# Altium PCB PCB.PcbDoc
Units mm, origin at the board's own origin, x right, y up, seen from the top; angles counter-clockwise.
Board outline 59.59 x 58.75 mm, 2 copper layers (Top Layer, Bottom Layer), stack 1 mm thick; 29 components, 23 nets, 150 pads, 124 vias.
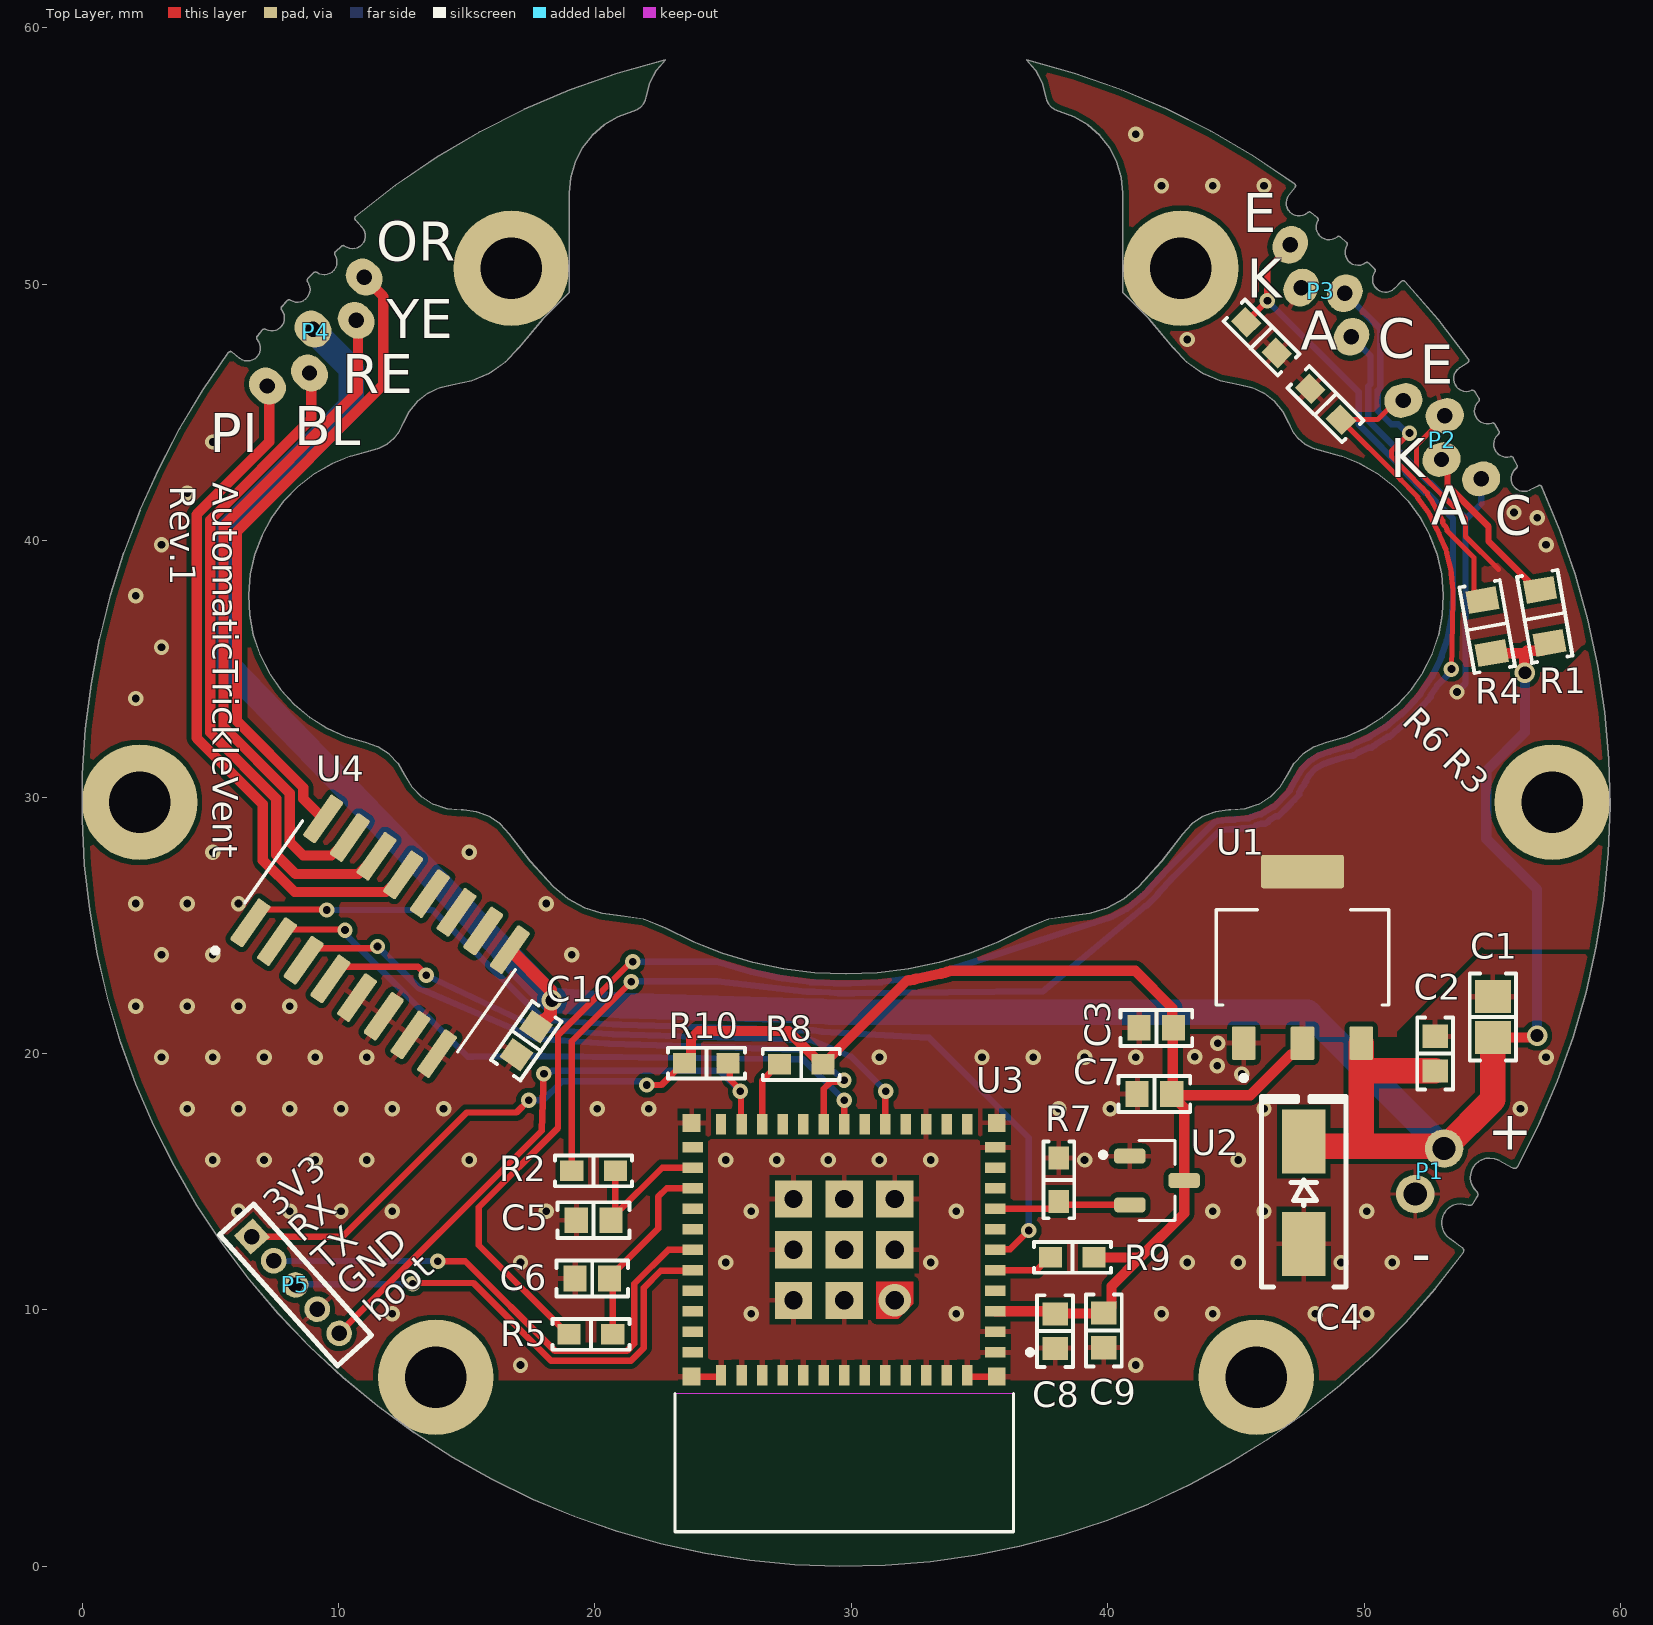
[diagram p0: Top Layer view]
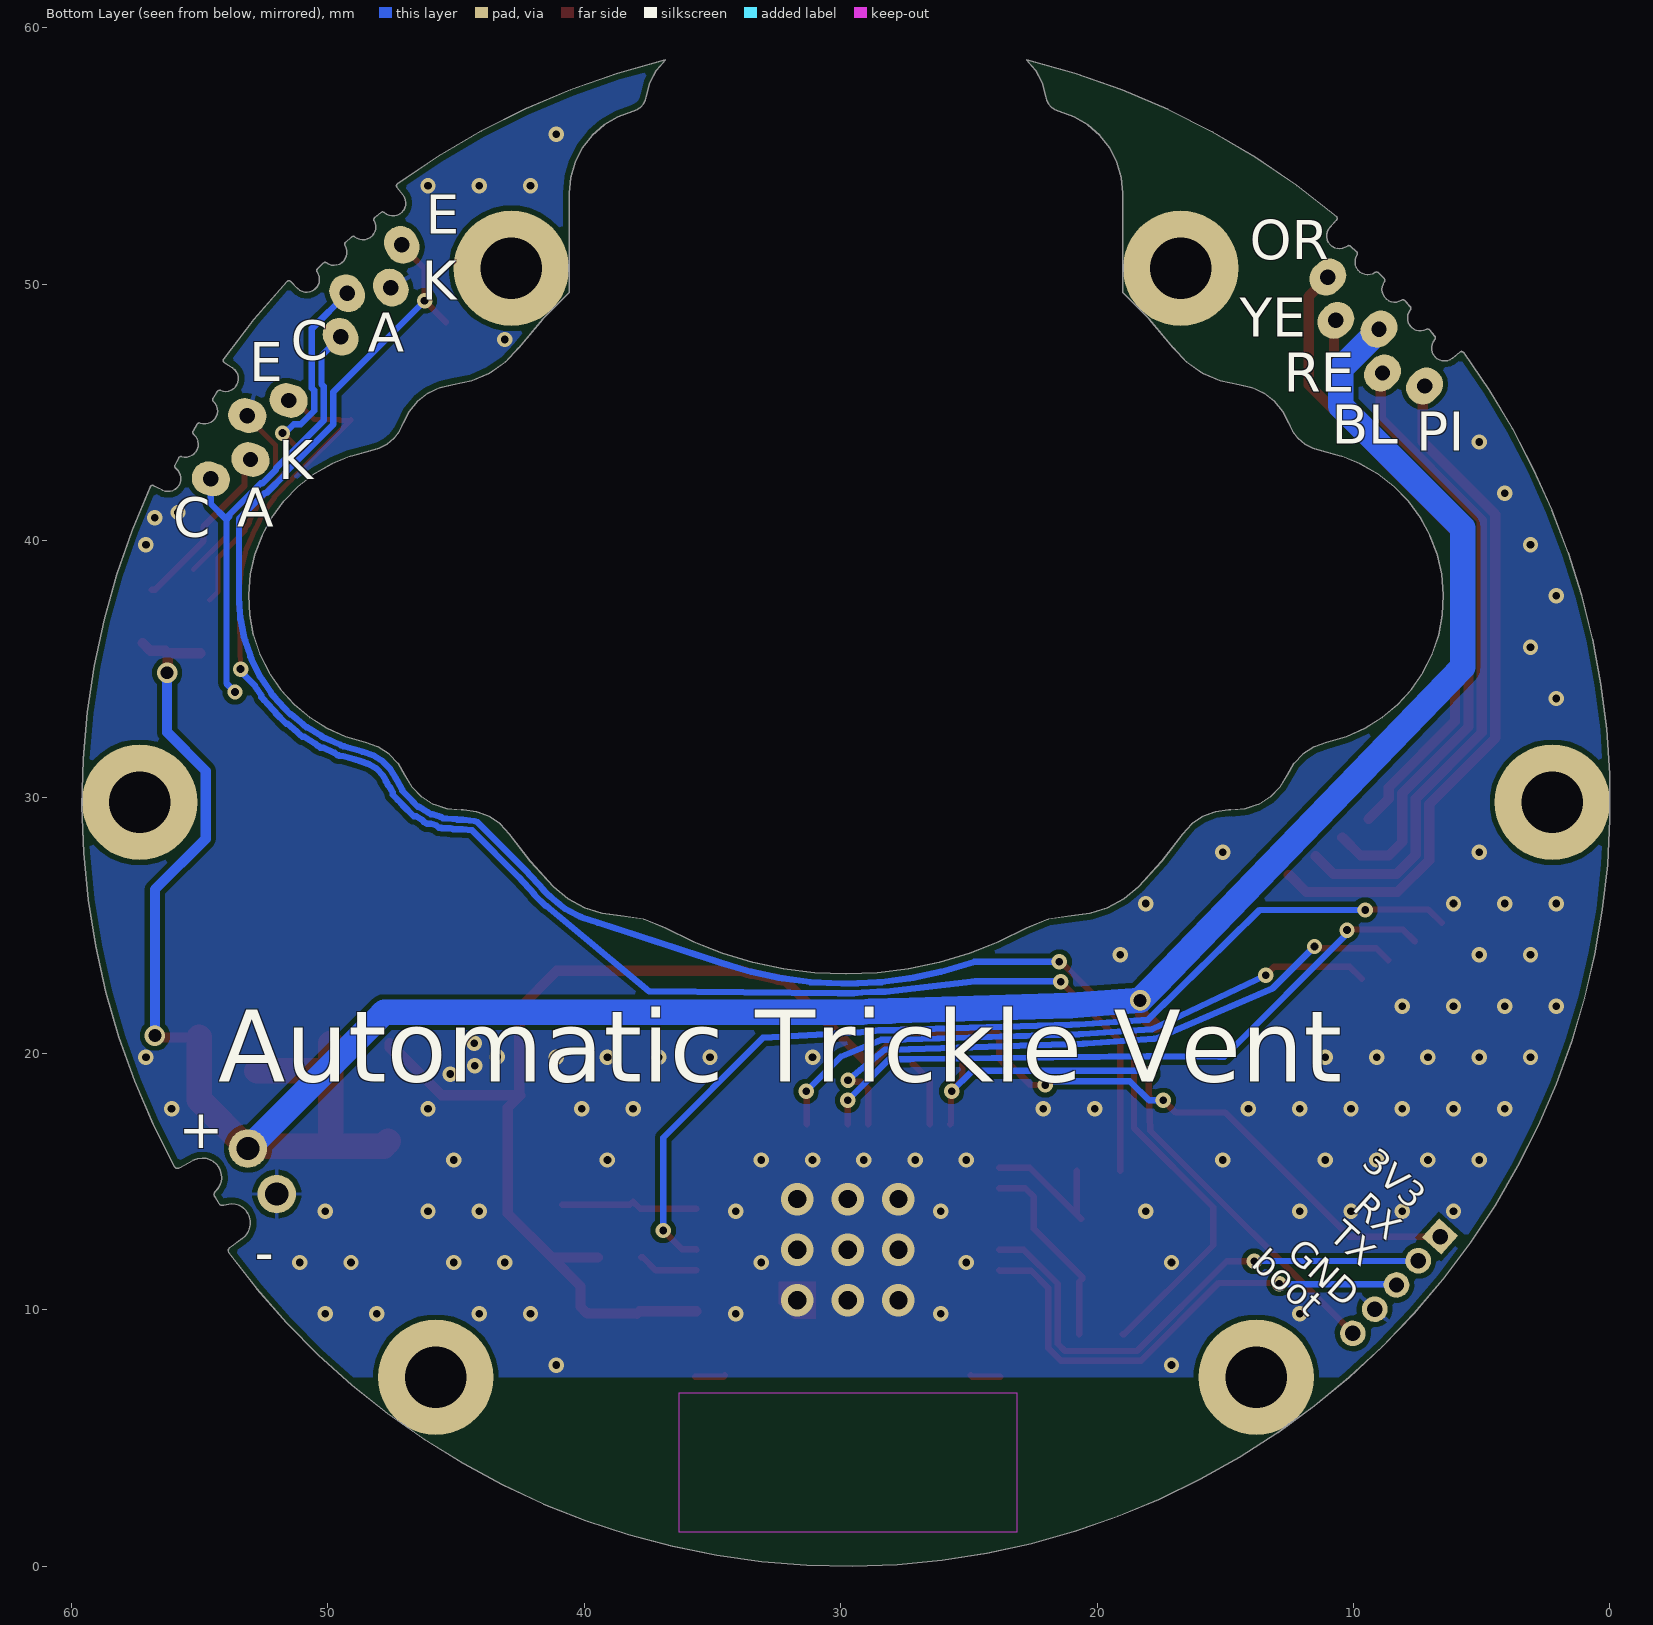
[diagram p1: Bottom Layer view, seen from below]
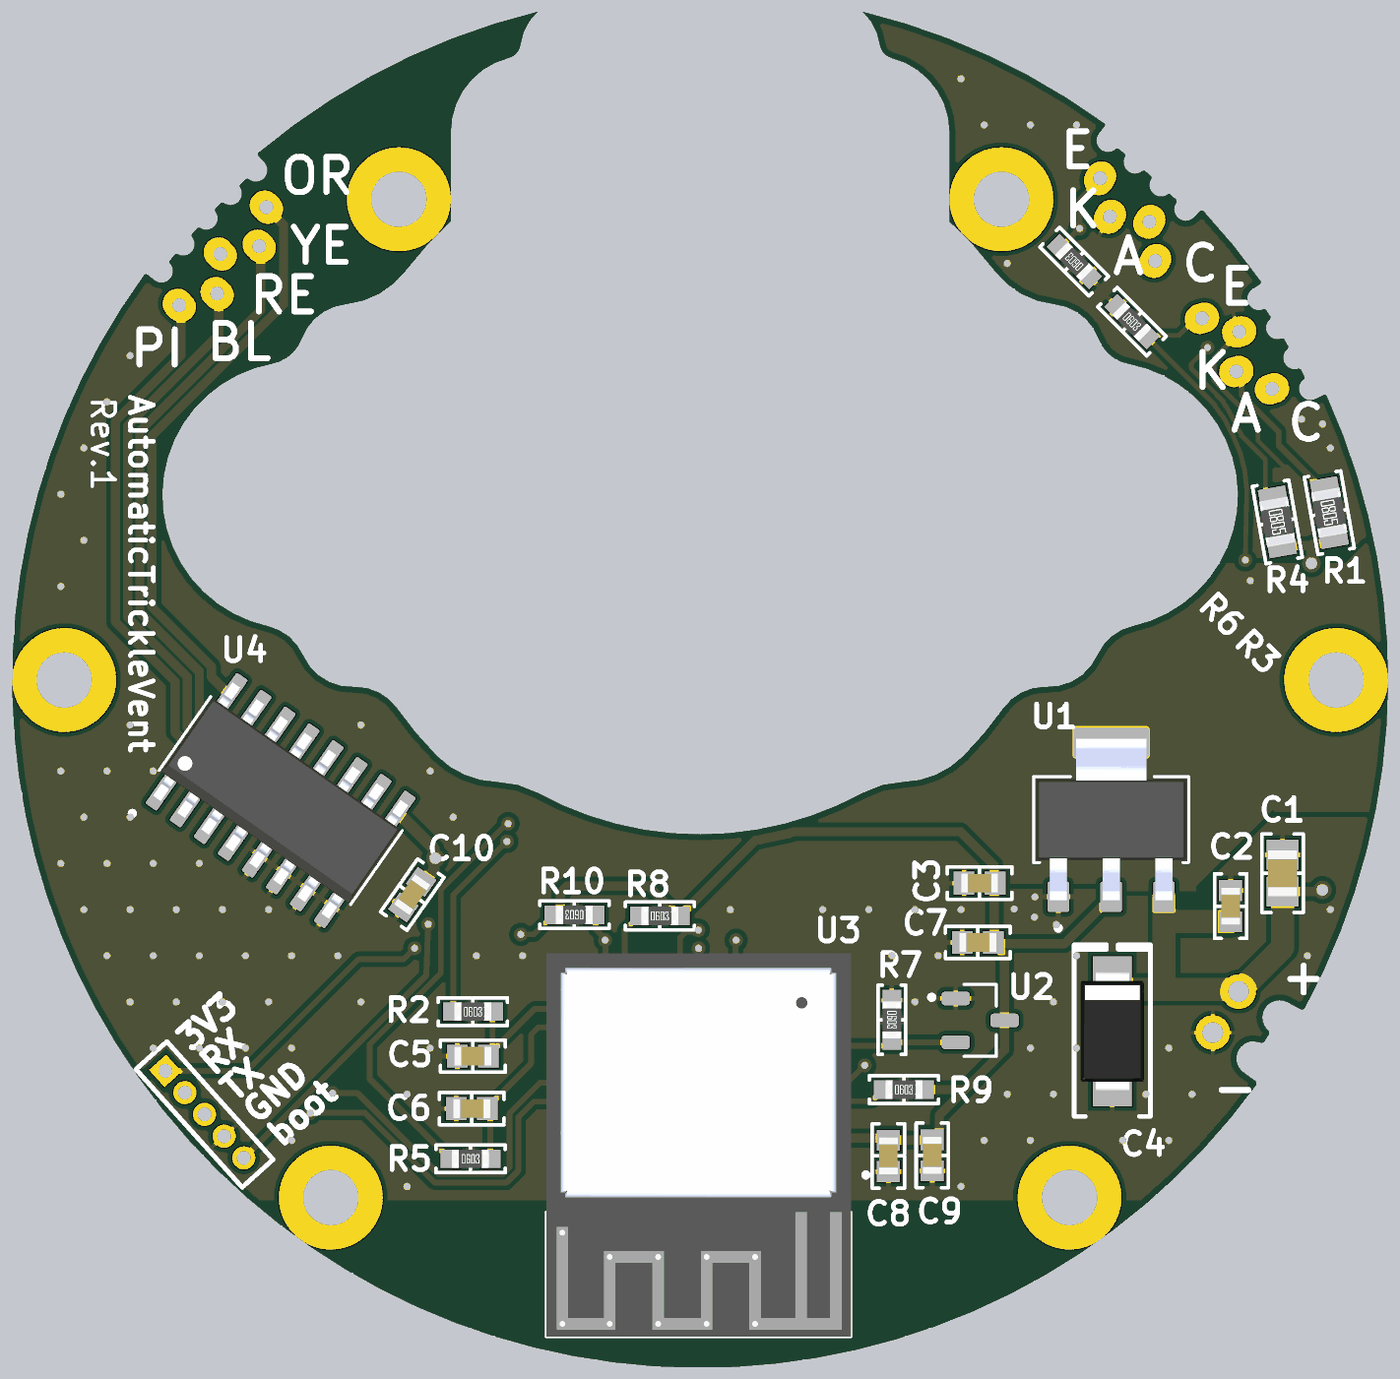
[diagram p2: 3D render of the assembled board from above, using the file's embedded part models]

## Layer stack, top to bottom
Top Solder: solder mask 0.0102, Solder Resist, Dk 3.5
Top Layer: signal copper 0.018
Dielectric 1: dielectric 0.964, FR-4, Dk 4.8
Bottom Layer: signal copper 0.018
Bottom Solder: solder mask 0.0102, Solder Resist, Dk 3.5

## Board outline
668 vertices, not listed, extent 0.004,-0.001 59.595,58.753

## Design rules (kind name [scope] priority, off if disabled: settings)
AcuteAngle [All] p1: minimum=3.50000000000000E+0001 checktracksonly=FALSE
BoardOutlineClearance "BoardOutlineClearance 1" [All] p1: gap=0.25 ignorepadtopadclearanceinfootprint=FALSE except(0: Arc-SplitContinuation Track-SplitContinuation SMDPad-SplitContinuation THPad-SplitContinuation Via-SplitContinuation Fill-SplitContinuation Poly-SplitContinuation Region-SplitContinuation Text-SplitContinuation) // Milling
BoardOutlineClearance "BoardOutlineClearance 2" [All] p2: gap=0.4 ignorepadtopadclearanceinfootprint=FALSE except(0: Arc-SplitContinuation Track-SplitContinuation SMDPad-SplitContinuation THPad-SplitContinuation Via-SplitContinuation Fill-SplitContinuation Poly-SplitContinuation Region-SplitContinuation Text-SplitContinuation) // V-Cut
Clearance "Clearance 3 Oz" [All] p1 off: gap=0.35 ignorepadtopadclearanceinfootprint=FALSE except(0.25: Arc-Hole Track-Hole SMDPad-Hole THPad-Hole Via-Hole Fill-Hole Poly-Hole Region-Hole Text-Hole)
Clearance "Clearance 2 Oz" [All] p2 off: gap=0.3 ignorepadtopadclearanceinfootprint=FALSE except(0.25: Arc-Hole Track-Hole SMDPad-Hole THPad-Hole Via-Hole Fill-Hole Poly-Hole Region-Hole Text-Hole)
Clearance "Clearance-1 1 Oz" [All] p3 off: gap=0.2 ignorepadtopadclearanceinfootprint=FALSE except(0.25: Arc-Hole Track-Hole SMDPad-Hole THPad-Hole Via-Hole Fill-Hole Poly-Hole Region-Hole Text-Hole) // Standart
Clearance "Clearance-2 1 Oz" [All] p4 off: gap=0.15 ignorepadtopadclearanceinfootprint=FALSE except(0.2: Arc-Fill Arc-Poly Track-Fill Track-Poly SMDPad-Fill SMDPad-Poly THPad-Fill THPad-Poly Via-Fill Via-Poly Fill-Fill Fill-Poly Poly-Poly; 0.25: Arc-Hole Track-Hole SMDPad-Hole THPad-Hole Via-Hole Fill-Hole Poly-Hole Region-Hole Text-Hole) // Advance
Clearance "Clearance-1 1/2 Oz" [All] p5: gap=0.125 ignorepadtopadclearanceinfootprint=FALSE except(0.2: Arc-Fill Arc-Poly Track-Fill Track-Poly SMDPad-SMDPad SMDPad-Fill SMDPad-Poly THPad-Fill THPad-Poly Via-Fill Via-Poly Fill-Fill Fill-Poly Poly-Poly Poly-Region Poly-Text; 0.25: Arc-Hole Track-Hole SMDPad-Hole THPad-Hole Via-Hole Fill-Hole Poly-Hole Region-Hole Text-Hole) // Standart
Clearance "Clearance-2 1/2 Oz" [All] p6 off: gap=0.1 ignorepadtopadclearanceinfootprint=FALSE except(0.15: Arc-Fill Arc-Poly Track-Fill Track-Poly SMDPad-SMDPad SMDPad-Fill SMDPad-Poly THPad-Fill THPad-Poly Via-Fill Via-Poly Fill-Fill Fill-Poly Poly-Poly Poly-Region Poly-Text; 0.25: Arc-Hole Track-Hole SMDPad-Hole THPad-Hole Via-Hole Fill-Hole Poly-Hole Region-Hole Text-Hole) // Advance
DiffPairsRouting "DiffPairsRouting 1 Oz" [All] p1: maxlimit=0.254 minlimit=0.2 mostfreqgap=0.254 toplayer_minwidth=0.2 toplayer_maxwidth=0.381 toplayer_prefwidth=0.381 bottomlayer_minwidth=0.2 bottomlayer_maxwidth=0.381 bottomlayer_prefwidth=0.381 maxuncoupledlength=12.7
DiffPairsRouting "DiffPairsRouting 1/2 Oz" [All] p2: maxlimit=0.254 minlimit=0.1 mostfreqgap=0.254 toplayer_minwidth=0.1 toplayer_maxwidth=0.381 toplayer_prefwidth=0.381 bottomlayer_minwidth=0.1 bottomlayer_maxwidth=0.381 bottomlayer_prefwidth=0.381 maxuncoupledlength=12.7
HoleSize "Minimum HoleSize" [IsPad] p1: absolutevalues=TRUE maxlimit=5.9 minlimit=0.6 maxpercent=80.000 minpercent=20.000
HoleSize "Minimum HoleSize VIA 1" [IsVia] p2: absolutevalues=TRUE maxlimit=5.9 minlimit=0.3 maxpercent=80.000 minpercent=20.000 // Standart
HoleSize "Minimum HoleSize VIA 2" [IsVia] p3: absolutevalues=TRUE maxlimit=5.9 minlimit=0.2 maxpercent=80.000 minpercent=20.000 // Advance
HoleToHoleClearance Hole2HoleClearance [All] p1: gap=0.25 allowstackedmicrovias=FALSE
MinimumAnnularRing "Minimum AR VIA Standart" [IsVia] p1: minimumring=0.15
MinimumAnnularRing "Minimum AR PAD Standart" [IsPAD] p2: minimumring=0.2
MinimumAnnularRing "Minimum AR VIA Advance" [IsVia] p3: minimumring=0.1
MinimumAnnularRing "Minimum AR PAD Advance" [IsPAD] p4: minimumring=0.15
MinimumSolderMaskSliver "SolderMask Bridge Standart" [All] p1: minsoldermaskwidth=0.15 // All Masks
MinimumSolderMaskSliver "SolderMask Bridge Advance" [All] p2 off: minsoldermaskwidth=0.1 // Mask LDI
PlaneClearance "PlaneClearance 3 Oz" [All] p1 off: clearance=0.35
PlaneClearance "PlaneClearance 2 Oz" [All] p2 off: clearance=0.3
PlaneClearance "PlaneClearance 1 Oz" [All] p3 off: clearance=0.2
PlaneClearance "PlaneClearance-1 1/2 Oz" [All] p4: clearance=0.2 // Standart
PlaneClearance "PlaneClearance-2 1/2 Oz" [All] p5 off: clearance=0.15 // Advance
PlaneConnect "TermalConnect 3 Oz" [All] p1 off: planeconnectstyle=Relief reliefexpansion=0.2 reliefentries=4 reliefconductorwidth=0.35 reliefairgap=0.35 // Standart
PlaneConnect "TermalConnect 2 Oz" [All] p2 off: planeconnectstyle=Relief reliefexpansion=0.2 reliefentries=4 reliefconductorwidth=0.3 reliefairgap=0.3 // Standart
PlaneConnect "TermalConnect-1 1 Oz" [All] p3 off: planeconnectstyle=Relief reliefexpansion=0.2 reliefentries=4 reliefconductorwidth=0.2 reliefairgap=0.2 // Standart
PlaneConnect "TermalConnect-2 1 Oz" [All] p4 off: pad.planeconnectstyle=Relief pad.reliefexpansion=0.15 pad.reliefentries=4 pad.reliefconductorwidth=0.2 pad.reliefairgap=0.2 via.planeconnectstyle=Direct via.reliefexpansion=0.15 via.reliefentries=4 via.reliefconductorwidth=0.15 via.reliefairgap=0.15 // Advance
PlaneConnect "TermalConnect-1 1/2 Oz" [All] p5: planeconnectstyle=Relief reliefexpansion=0.2 reliefentries=4 reliefconductorwidth=0.2 reliefairgap=0.2 // Standart
PlaneConnect "TermalConnect-2 1/2 Oz" [All] p6 off: pad.planeconnectstyle=Relief pad.reliefexpansion=0.15 pad.reliefentries=4 pad.reliefconductorwidth=0.15 pad.reliefairgap=0.15 via.planeconnectstyle=Direct via.reliefexpansion=0.15 via.reliefentries=4 via.reliefconductorwidth=0.15 via.reliefairgap=0.15 // Advance
PolygonConnect "PolygonConnect 3 Oz" [All] p1 off: thpad.connectstyle=Relief thpad.reliefconductorwidth=0.35 thpad.reliefentries=4 thpad.polygonreliefangle="90 Angle" thpad.airgapwidth=0.35 smdpad.connectstyle=Relief smdpad.reliefconductorwidth=0.35 smdpad.reliefentries=4 smdpad.polygonreliefangle="90 Angle" smdpad.airgapwidth=0.35 via.connectstyle=Direct via.reliefconductorwidth=0.254 via.reliefentries=4 via.polygonreliefangle="90 Angle" via.airgapwidth=0.254
PolygonConnect "PolygonConnect 2 Oz" [All] p2 off: thpad.connectstyle=Relief thpad.reliefconductorwidth=0.3 thpad.reliefentries=4 thpad.polygonreliefangle="90 Angle" thpad.airgapwidth=0.3 smdpad.connectstyle=Relief smdpad.reliefconductorwidth=0.3 smdpad.reliefentries=4 smdpad.polygonreliefangle="90 Angle" smdpad.airgapwidth=0.3 via.connectstyle=Direct via.reliefconductorwidth=0.254 via.reliefentries=4 via.polygonreliefangle="90 Angle" via.airgapwidth=0.254
PolygonConnect "PolygonConnect-1 1 Oz" [All] p3 off: thpad.connectstyle=Relief thpad.reliefconductorwidth=0.2 thpad.reliefentries=4 thpad.polygonreliefangle="90 Angle" thpad.airgapwidth=0.2 smdpad.connectstyle=Relief smdpad.reliefconductorwidth=0.2 smdpad.reliefentries=4 smdpad.polygonreliefangle="90 Angle" smdpad.airgapwidth=0.2 via.connectstyle=Direct via.reliefconductorwidth=0.254 via.reliefentries=4 via.polygonreliefangle="90 Angle" via.airgapwidth=0.254 // Standart
PolygonConnect "PolygonConnect-2 1 Oz" [All] p4 off: thpad.connectstyle=Relief thpad.reliefconductorwidth=0.15 thpad.reliefentries=4 thpad.polygonreliefangle="90 Angle" thpad.airgapwidth=0.15 smdpad.connectstyle=Relief smdpad.reliefconductorwidth=0.15 smdpad.reliefentries=4 smdpad.polygonreliefangle="90 Angle" smdpad.airgapwidth=0.15 via.connectstyle=Direct via.reliefconductorwidth=0.254 via.reliefentries=4 via.polygonreliefangle="90 Angle" via.airgapwidth=0.254 // Advance
PolygonConnect "PolygonConnect-1 1/2 Oz" [All] p5: thpad.connectstyle=Relief thpad.reliefconductorwidth=0.15 thpad.reliefentries=4 thpad.polygonreliefangle="90 Angle" thpad.airgapwidth=0.2 smdpad.connectstyle=Relief smdpad.reliefconductorwidth=0.2 smdpad.reliefentries=4 smdpad.polygonreliefangle="90 Angle" smdpad.airgapwidth=0.2 via.connectstyle=Direct via.reliefconductorwidth=0.254 via.reliefentries=4 via.polygonreliefangle="90 Angle" via.airgapwidth=0.254 // Standart
PolygonConnect "PolygonConnect-2 1/2 Oz" [All] p6 off: thpad.connectstyle=Relief thpad.reliefconductorwidth=0.125 thpad.reliefentries=4 thpad.polygonreliefangle="90 Angle" thpad.airgapwidth=0.15 smdpad.connectstyle=Relief smdpad.reliefconductorwidth=0.125 smdpad.reliefentries=4 smdpad.polygonreliefangle="90 Angle" smdpad.airgapwidth=0.15 via.connectstyle=Direct via.reliefconductorwidth=0.254 via.reliefentries=4 via.polygonreliefangle="90 Angle" via.airgapwidth=0.254 // Advance
RoutingCorners [All] p1 off: cornerstyle=45-Degree minsetback=2.54 maxsetback=2.54
RoutingVias [All] p1: holewidth=0.3 width=0.6 viastyle="Through Hole" minholewidth=0.2 minwidth=0.4 maxholewidth=5.9 maxwidth=6.4
SilkToSilkClearance Silk2SilkClearance [All] p1 off: silktosilkclearance=0.15
SilkToSolderMaskClearance Silk2SolderMaskClearance [IsPad] p1 off: minsilkscreentomaskgap=0.15 clearancetoexposedcopper=TRUE
SolderMaskExpansion SolderMaskExpansion-1 [All] p1: expansion=0.05 istentingtop=FALSE // Standart
SolderMaskExpansion "SolderMaskExpansion LDI" [All] p2: expansion=0.025 istentingtop=FALSE // Advance
UnRoutedNet [All] p1: checkbadconnections=TRUE
Width "Width 3 Oz" [All] p1 off: maxlimit=10 minlimit=0.35 preferedwidth=0.4 checkconnectedcopper=TRUE
Width "Width 2 Oz" [All] p2 off: maxlimit=10 minlimit=0.3 preferedwidth=0.35 minimp=50.000000 maximp=50.000000 favimp=50.000000 checkconnectedcopper=TRUE
Width "Width 1 Oz" [All] p3 off: maxlimit=10 minlimit=0.15 preferedwidth=0.2 checkconnectedcopper=TRUE
Width "Width 1/2 Oz" [All] p4: maxlimit=10 minlimit=0.1 preferedwidth=0.125 checkconnectedcopper=TRUE
20 further rules are at their usual default settings.

## Components (designator, comment, footprint, x,y, rotation, side; value= is the part's Value field where it differs from the comment)
C1 "10 µF" "CAP 0805_2012" 55.025,21.425 r270 top
C2 "0.1 µF" "CAP 0603_1608" 52.775,20 r270 top
C3 "=VALUE" "CAP 0603_1608" 41.9,21 r0 top
C4 "SMAJ12A" "DO214AC SMA" 47.65,14.575 r90 top
C5 "10000 pF" "CAP 0603_1608" 19.95,13.5 r0 top
C6 "10000 pF" "CAP 0603_1608" 19.9,11.225 r0 top
C7 "0.1 µF" "CAP 0603_1608" 41.825,18.425 r0 top
C8 "0.1 µF" "CAP 0603_1608" 37.95,9.175 r90 top
C9 "4.7 µF" "CAP 0603_1608" 39.85,9.2 r90 top
C10 "=VALUE" "CAP 0603_1608" 17.325,20.5 r235 top
P1 "POWER +5V" HDR1X2H 57.86,13.25 r0 top
P2 "OPTO 1" HDR1X4H#1 64.476,39.006 r110 top
P3 "OPTO 2" HDR1X4H#2 59.128,52.852 r130 top
P4 "MOTOR" HDR1X5H 9.046,53.046 r225 top
P5 "MHDR1X5" MHDR1X5 6.625,12.863 r312 top locked
R1 "160 Ohms" "YAGEO RES 0805_2012" 57.05,37.05 r280 top
R2 "1 kOhms" "YAGEO RES 0603_1608" 19.95,15.425 r0 top
R3 "10 kOhms" "YAGEO RES 0603_1608" 48.5,45.325 r315 top
R4 "160 Ohms" "YAGEO RES 0805_2012" 54.8,36.65 r280 top
R5 "1 kOhms" "YAGEO RES 0603_1608" 19.85,9.05 r0 top
R6 "10 kOhms" "YAGEO RES 0603_1608" 46,47.925 r135 top
R7 "100 kOhms" "YAGEO RES 0603_1608" 38.1,15.075 r270 top
R8 "10 kOhms" "YAGEO RES 0603_1608" 28.05,19.575 r0 top
R9 "10 kOhms" "YAGEO RES 0603_1608" 38.625,12.05 r0 top
R10 "10 kOhms" "YAGEO RES 0603_1608" 24.35,19.625 r180 top
U1 "AMS1117" SOT229P700X180-4N 47.6,23.75 r90 top
U2 "MAX809SEUR+T" SOT95P237X112-3N 41.925,15.05 r0 top
U3 "ESP32-C3-MINI-1-N4" XCVR_ESP32-C3-MINI-1-N4 29.725,9.65 r180 top
U4 "ULN2003AD" SOIC127P600X175-16N 11.625,24.575 r55 top

## Footprints (in the part's own frame and the unit in brackets; to place one, negate y for a bottom-side part, rotate by r counter-clockwise, add the part's x,y. Pads: shape width x height; smd on the part's side, far side on the other; paste and mask are expansions set on the pad)
"CAP 0603_1608" [mm] "Chip Capacitor, 2-Leads, Body 1.60x0.80mm, IPC Medium Density"
  rect 0.9x1 smd: 1(-0.675,0) 2(0.675,0)
  silkscreen extent -1.4,-0.7 1.4,0.7, body extent -0.8,-0.41 0.8,0.41, height 0.82
"CAP 0805_2012" [mm] "Chip Capacitor, 2-Leads, Body 2.00x1.20mm, IPC Medium Density"
  rect 1.3x1.4 smd: 1(-0.8,0) 2(0.8,0)
  silkscreen extent -1.7,-0.9 1.7,0.9, body extent -1,-0.64 1,0.64, height 1.26
"DO214AC SMA" [mm] "Molded Diode, 2-Leads, Body 4.30x2.60mm, IPC Medium Density"
  rect 2.5x1.7 smd: 1(-2,0) 2(2,0)
  silkscreen extent -3.68,-1.65 3.75,1.65, body extent -2.6,-1.37 2.6,1.37, height 2.4
HDR1X2H [mm] "Connector; Header; 2 Position; Right Angle"
  round 1.5 hole 0.9: 1(-4.739,3.046) 2(-5.861,1.271)
HDR1X4H#1 [mm] "Connector; Header; 4 Position; Right Angle"
  oval 1.3x1.5 hole 0.6 rot 178: 1(6.593,8.145) 2(7.828,9.339) 3(10.503,9.95) 4(9.396,8.636)
HDR1X4H#2 [mm] "Connector; Header; 4 Position; Right Angle"
  oval 1.3x1.5 hole 0.6 rot 20: 1(2.433,10.518) 2(3.899,9.621) 3(6.713,10.042) 4(5.163,10.785)
HDR1X5H [mm] "Connector; Header; 5 Position; Right Angle"
  oval 1.3x1.5 hole 0.6: 1(3.414,3.36) 2(0.568,3.337) 3(1.983,4.312) 4(4.722,4.475) 5(6.242,3.674)
MHDR1X5 [mm] "Connector; Header; 5 Position"
  rect 1x1 hole 0.6: 1(0,0)
  round 1 hole 0.6: 2(1.27,0) 3(2.54,0) 4(3.81,0) 5(5.08,0)
  silkscreen extent -0.9,-0.9 5.98,0.9
SOIC127P600X175-16N [mm]
  rrect25% 1.97x0.6 smd: 1(-2.475,4.445) 2(-2.475,3.175) 3(-2.475,1.905) 4(-2.475,0.635) 5(-2.475,-0.635) 6(-2.475,-1.905) 7(-2.475,-3.175) 8(-2.475,-4.445) 9(2.475,-4.445) 10(2.475,-3.175) 11(2.475,-1.905) 12(2.475,-0.635) 13(2.475,0.635) 14(2.475,1.905) 15(2.475,3.175) 16(2.475,4.445)
  silkscreen extent -4.24,-5.07 1.95,5.07, body extent -3,-4.95 3,4.95, height 1.75
SOT95P237X112-3N [mm]
  rrect50% 1.23x0.59 smd: 1(-1.06,0.95) 2(-1.06,-0.95) 3(1.06,0)
  silkscreen extent -2.2,-1.56 0.7,1.56
SOT229P700X180-4N [mm]
  rrect15% 1.31x0.93 smd: 1(-3.345,2.29) 2(-3.345,0) 3(-3.345,-2.29)
  rrect15% 1.31x3.24 smd: 4(3.345,0)
  silkscreen extent -4.8,-3.36 1.86,3.36, body extent -3.5,-3.25 3.5,3.25, height 1.8
XCVR_ESP32-C3-MINI-1-N4 [mm]
  rect 0.8x0.4 smd: 1(-5.9,1.3) 2(-5.9,0.5) 3(-5.9,-0.3) 4(-5.9,-1.1) 5(-5.9,-1.9) 6(-5.9,-2.7) 7(-5.9,-3.5) 8(-5.9,-4.3) 9(-5.9,-5.1) 10(-5.9,-5.9) 11(-5.9,-6.7) 25(5.9,-6.7) 26(5.9,-5.9) 27(5.9,-5.1) 28(5.9,-4.3) 29(5.9,-3.5) 30(5.9,-2.7) 31(5.9,-1.9) 32(5.9,-1.1) 33(5.9,-0.3) 34(5.9,0.5) 35(5.9,1.3)
  rect 0.4x0.8 smd: 12(-4.8,-7.6) 13(-4,-7.6) 14(-3.2,-7.6) 15(-2.4,-7.6) 16(-1.6,-7.6) 17(-0.8,-7.6) 18(0,-7.6) 19(0.8,-7.6) 20(1.6,-7.6) 21(2.4,-7.6) 22(3.2,-7.6) 23(4,-7.6) 24(4.8,-7.6) 36(4.8,2.2) 37(4,2.2) 38(3.2,2.2) 39(2.4,2.2) 40(1.6,2.2) 41(0.8,2.2) 42(0,2.2) 43(-0.8,2.2) 44(-1.6,2.2) 45(-2.4,2.2) 46(-3.2,2.2) 47(-4,2.2) 48(-4.8,2.2)
  rect 0.6x0.6 smd paste-1 mask+0: 49_1(-1.975,-0.725)
  rect 1.45x1.45 smd: 49_2(0,-0.725) 49_3(1.975,-0.725) 49_4(1.975,-2.7) 49_5(1.975,-4.675) 49_6(0,-4.675) 49_7(-1.975,-4.675) 49_8(-1.975,-2.7) 49_9(0,-2.7)
  rect 0.7x0.7 smd: 50(5.95,2.25) 51(5.95,-7.65) 52(-5.95,-7.65) 53(-5.95,2.25)
  Top Layer region: -1.25,-1.45 -2.7,-1.45 -2.7,-0.6 -2.1,0 -1.25,0
  Keep-Out Layer region: 6.6,2.9 -6.6,2.9 -6.6,8.3 6.6,8.3
  Keep-Out Layer region: 6.6,2.9 -6.6,2.9 -6.6,8.3 6.6,8.3
  silkscreen extent -7.35,1.2 6.6,8.3, body extent -6.6,-8.3 6.6,8.3, height 2.55
"YAGEO RES 0603_1608" [mm] "Chip Resistor, 2-Leads, Body 1.60x0.80mm"
  rect 0.9x0.8 smd: 1(-0.85,0) 2(0.85,0)
  silkscreen extent -1.5,-0.6 1.5,0.6, body extent -0.8,-0.4 0.8,0.4, height 0.45
"YAGEO RES 0805_2012" [mm] "Chip Resistor, 2-Leads, Body 2.00x1.25mm"
  rect 0.9x1.2 smd: 1(-1.05,0) 2(1.05,0)
  silkscreen extent -1.7,-0.8 1.7,0.8, body extent -1,-0.62 1,0.63, height 0.6

## Part data
C1: library part CC0805KKX5R8BB106, "CAP CER 10UF 25V X5R 0805", Device Package="0805 (2012 Metric)", Manufacturer=Yageo, Operating Temperature="-55°C ~ 85°C", Supplier Part Number 1=311-1869-1-ND, Temperature Coefficient=X5R, Tolerance=±10%, Voltage - Rated=25V, Applications="General Purpose", Capacitance="10 µF", ComponentLink1Description=Datasheet, ComponentLink1URL=https://www.yageo.com/upload/media/product/productsearch/datasheet/mlcc/UPY-GPHC_X5R_4V-to-50V_25.pdf, ComponentLink2Description="DigiKey Link", ComponentLink2URL=https://www.digikey.com/en/products/detail/yageo/CC0805KKX5R8BB106/5195275, LastUpdated="09.02.2024 20:15:28", Lifecycle Status=Active, Minimum Order=1, Mounting Type="Surface Mount, MLCC", Package / Case="0805 (2012 Metric)", Packaging=TapeAndReel, Part Number=CC0805KKX5R8BB106, Part Status=Active, PartId=16151, Price=0.06, Series=CC, Size / Dimension="0.079\" L x 0.049\" W (2.00mm x 1.25mm)", Supplier 1=DigiKey, Thickness (Max)="0.057\" (1.45mm)"
C2 C7 C8: library part CC0603KRX7R9BB104, "CAP CER 0.1UF 50V X7R 0603", Device Package="0603 (1608 Metric)", Manufacturer=Yageo, Operating Temperature="-55°C ~ 125°C", Supplier Part Number 1=311-1344-1-ND, Temperature Coefficient=X7R, Tolerance=±10%, Voltage - Rated=50V, Applications="General Purpose", Capacitance="0.1 µF", ComponentLink1Description=Datasheet, ComponentLink1URL=https://www.yageo.com/upload/media/product/productsearch/datasheet/mlcc/UPY-GPHC_X7R_6.3V-to-50V_18.pdf, ComponentLink2Description="DigiKey Link", ComponentLink2URL=https://www.digikey.com/en/products/detail/yageo/CC0603KRX7R9BB104/2103082, LastUpdated="09.02.2024 20:10:21", Lifecycle Status=Active, Minimum Order=1, Mounting Type="Surface Mount, MLCC", Package / Case="0603 (1608 Metric)", Packaging=TapeAndReel, Part Number=CC0603KRX7R9BB104, Part Status=Active, PartId=9506, Price=0.01, Series=CC, Size / Dimension="0.063\" L x 0.031\" W (1.60mm x 0.80mm)", Supplier 1=DigiKey, Thickness (Max)="0.035\" (0.90mm)"
C3 C10: library part C0603C475K9PAC7867, "CAP CER 4.7UF 6.3V X5R 0603", Capacitance="4.7 µF", Part Number=C0603C475K9PAC7867
C4: "TVS DIODE 12VWM 19.9VC DO214AC", Current - Peak Pulse (10/1000µs)=20.1A, Manufacturer="Littelfuse Inc.", Operating Temperature="-65°C ~ 150°C (TJ)", Package / Case="DO-214AC, SMA", Power - Peak Pulse=400W, Power Line Protection=No, Supplier Device Package="DO-214AC (SMA)", Supplier Part Number 1=SMAJ12ALFCT-ND, Voltage - Breakdown (Min)=13.3V, Voltage - Clamping (Max) @ Ipp=19.9V, Voltage - Reverse Standoff (Typ)=12V, Applications="General Purpose", ComponentLink1Description=Datasheet, ComponentLink1URL=https://www.littelfuse.com/~/media/electronics/datasheets/tvs_diodes/littelfuse_tvs_diode_smaj_datasheet.pdf.pdf, ComponentLink2Description="DigiKey Link", ComponentLink2URL=https://www.digikey.com/en/products/detail/littelfuse-inc/SMAJ12A/762270, LastUpdated="03.06.2024 19:57:22", Lifecycle Status=Active, Minimum Order=1, Mounting Type="Surface Mount", Packaging=TapeAndReel, Part Number=SMAJ12A, Part Status=Active, PartId=5712, Price=0.08, Series=SMAJ, Supplier 1=DigiKey, Type=Zener, Unidirectional Channels=1
C5 C6: library part CC0603KRX7R9BB103, "CAP CER 10000PF 50V X7R 0603", Device Package="0603 (1608 Metric)", Manufacturer=Yageo, Operating Temperature="-55°C ~ 125°C", Supplier Part Number 1=311-1085-1-ND, Temperature Coefficient=X7R, Tolerance=±10%, Voltage - Rated=50V, Applications="General Purpose", Capacitance="10000 pF", ComponentLink1Description=Datasheet, ComponentLink1URL=https://www.yageo.com/upload/media/product/productsearch/datasheet/mlcc/UPY-GPHC_X7R_6.3V-to-50V_18.pdf, ComponentLink2Description="DigiKey Link", ComponentLink2URL=https://www.digikey.com/en/products/detail/yageo/CC0603KRX7R9BB103/302819, LastUpdated="09.02.2024 20:10:06", Lifecycle Status=Active, Minimum Order=1, Mounting Type="Surface Mount, MLCC", Package / Case="0603 (1608 Metric)", Packaging=TapeAndReel, Part Number=CC0603KRX7R9BB103, Part Status=Active, PartId=17848, Price=0.01, Series=CC, Size / Dimension="0.063\" L x 0.031\" W (1.60mm x 0.80mm)", Supplier 1=DigiKey, Thickness (Max)="0.035\" (0.90mm)"
C9: library part C0603C475K9PAC7867, "CAP CER 4.7UF 6.3V X5R 0603", Device Package="0603 (1608 Metric)", Manufacturer=KEMET, Operating Temperature="-55°C ~ 85°C", Supplier Part Number 1=399-C0603C475K9PAC7867CT-ND, Temperature Coefficient=X5R, Tolerance=±10%, Voltage - Rated=6.3V, Applications="Bypass, Decoupling", Capacitance="4.7 µF", ComponentLink1Description=Datasheet, ComponentLink1URL=https://api.kemet.com/component-edge/download/datasheet/C0603C475K9PACTU.pdf, ComponentLink2Description="DigiKey Link", ComponentLink2URL=https://www.digikey.com/en/products/detail/kemet/C0603C475K9PAC7867/754744, LastUpdated="09.02.2024 20:09:55", Lifecycle Status=Active, Minimum Order=1, Mounting Type="Surface Mount, MLCC", Package / Case="0603 (1608 Metric)", Packaging=TapeAndReel, Part Number=C0603C475K9PAC7867, Part Status=Active, PartId=34879, Price=0.02, Series="SMD Comm X5R", Size / Dimension="0.063\" L x 0.031\" W (1.60mm x 0.80mm)", Supplier 1=DigiKey, Thickness (Max)="0.035\" (0.90mm)"
P1: library part "Header 2H", "Header, 2-Pin, Right Angle", LatestRevisionDate=17-Jul-2002, LatestRevisionNote="Re-released for DXP Platform.", Publisher="Altium Limited"
P2 P3: library part "Header 4H", "Header, 4-Pin, Right Angle", LatestRevisionDate=17-Jul-2002, LatestRevisionNote="Re-released for DXP Platform.", Publisher="Altium Limited"
P4: library part "Header 5H", "Header, 5-Pin, Right Angle", LatestRevisionDate=17-Jul-2002, LatestRevisionNote="Re-released for DXP Platform.", Publisher="Altium Limited"
P5: "Header, 5-Pin", LatestRevisionDate=17-Jul-2002, LatestRevisionNote="Re-released for DXP Platform.", Publisher="Altium Limited"
R1 R4: library part RC0805JR-07160RL, "RES 160 OHM 5% 1/8W 0805", Device Package="0805 (2012 Metric)", Manufacturer=Yageo, Operating Temperature="-55°C ~ 155°C", Power (Watts)="0.125W, 1/8W", Supplier Device Package=0805, Supplier Part Number 1=311-160ARCT-ND, Temperature Coefficient=±100ppm/°C, Tolerance=±5%, ComponentLink1Description=Datasheet, ComponentLink1URL=https://www.yageo.com/upload/media/product/productsearch/datasheet/rchip/PYu-RC_Group_51_RoHS_L_10.pdf, ComponentLink2Description="DigiKey Link", ComponentLink2URL=https://www.digikey.com/en/products/detail/yageo/RC0805JR-07160RL/728259, Composition="Thick Film", Features="Moisture Resistant", Height - Seated (Max)="0.024\" (0.60mm)", LastUpdated="25.07.2024 9:20:20", Lifecycle Status=Active, Minimum Order=1, Number of Terminations=2, Package / Case="0805 (2012 Metric)", Packaging=CutTape, Part Number=RC0805JR-07160RL, Part Status=Active, PartId=41917, Price=0.01, Resistance="160 Ohms", Series=RC_L, Size / Dimension="0.079\" L x 0.049\" W (2.00mm x 1.25mm)", Supplier 1=DigiKey
R2 R5: library part RC0603JR-071KL, "RES 1K OHM 5% 1/10W 0603", Device Package="0603 (1608 Metric)", Manufacturer=Yageo, Operating Temperature="-55°C ~ 155°C", Power (Watts)="0.1W, 1/10W", Supplier Device Package=0603, Supplier Part Number 1=311-1.0KGRCT-ND, Temperature Coefficient=±100ppm/°C, Tolerance=±5%, ComponentLink1Description=Datasheet, ComponentLink1URL=https://www.yageo.com/upload/media/product/productsearch/datasheet/rchip/PYu-RC_Group_51_RoHS_L_10.pdf, ComponentLink2Description="DigiKey Link", ComponentLink2URL=https://www.digikey.com/en/products/detail/yageo/RC0603JR-071KL/726677, Composition="Thick Film", Features="Moisture Resistant", Height - Seated (Max)="0.022\" (0.55mm)", LastUpdated="25.07.2024 9:19:19", Lifecycle Status=Active, Minimum Order=1, Number of Terminations=2, Package / Case="0603 (1608 Metric)", Packaging=CutTape, Part Number=RC0603JR-071KL, Part Status=Active, PartId=22594, Price=0.01, Resistance="1 kOhms", Series=RC_L, Size / Dimension="0.063\" L x 0.031\" W (1.60mm x 0.80mm)", Supplier 1=DigiKey
R3 R6 R8 R9 R10: library part RC0603JR-0710KL, "RES 10K OHM 5% 1/10W 0603", Device Package="0603 (1608 Metric)", Manufacturer=Yageo, Operating Temperature="-55°C ~ 155°C", Power (Watts)="0.1W, 1/10W", Supplier Device Package=0603, Supplier Part Number 1=311-10KGRCT-ND, Temperature Coefficient=±100ppm/°C, Tolerance=±5%, ComponentLink1Description=Datasheet, ComponentLink1URL=https://www.yageo.com/upload/media/product/productsearch/datasheet/rchip/PYu-RC_Group_51_RoHS_L_10.pdf, ComponentLink2Description="DigiKey Link", ComponentLink2URL=https://www.digikey.com/en/products/detail/yageo/RC0603JR-0710KL/726700, Composition="Thick Film", Features="Moisture Resistant", Height - Seated (Max)="0.022\" (0.55mm)", LastUpdated="25.07.2024 9:19:19", Lifecycle Status=Active, Minimum Order=1, Number of Terminations=2, Package / Case="0603 (1608 Metric)", Packaging=CutTape, Part Number=RC0603JR-0710KL, Part Status=Active, PartId=22593, Price=0.01, Resistance="10 kOhms", Series=RC_L, Size / Dimension="0.063\" L x 0.031\" W (1.60mm x 0.80mm)", Supplier 1=DigiKey
R7: library part RC0603JR-07100KL, "RES 100K OHM 5% 1/10W 0603", Device Package="0603 (1608 Metric)", Manufacturer=Yageo, Operating Temperature="-55°C ~ 155°C", Power (Watts)="0.1W, 1/10W", Supplier Device Package=0603, Supplier Part Number 1=311-100KGRCT-ND, Temperature Coefficient=±100ppm/°C, Tolerance=±5%, ComponentLink1Description=Datasheet, ComponentLink1URL=https://www.yageo.com/upload/media/product/productsearch/datasheet/rchip/PYu-RC_Group_51_RoHS_L_10.pdf, ComponentLink2Description="DigiKey Link", ComponentLink2URL=https://www.digikey.com/en/products/detail/yageo/RC0603JR-07100KL/726698, Composition="Thick Film", Features="Moisture Resistant", Height - Seated (Max)="0.022\" (0.55mm)", LastUpdated="25.07.2024 9:19:16", Lifecycle Status=Active, Minimum Order=1, Number of Terminations=2, Package / Case="0603 (1608 Metric)", Packaging=CutTape, Part Number=RC0603JR-07100KL, Part Status=Active, PartId=25667, Price=0.01, Resistance="100 kOhms", Series=RC_L, Size / Dimension="0.063\" L x 0.031\" W (1.60mm x 0.80mm)", Supplier 1=DigiKey
U1: "1A LOW DROPOUT VOLTAGE REGULATOR SOT-223", Package="SOT-223 Seeed Technology", Availability="Not in stock", Check_prices=https://www.snapeda.com/parts/AMS1117/Advanced+Monolithic+Systems/view-part/?ref=eda, MF="Advanced Monolithic Systems", MP=AMS1117, Price=None, SnapEDA_Link=https://www.snapeda.com/parts/AMS1117/Advanced+Monolithic+Systems/view-part/?ref=snap
U2: Package=None, Availability=Unavailable, MP=MAX809SEUR+T, Price=None
U3: "Bluetooth, WiFi 802.11b/g/n, Bluetooth v5.0 Transceiver Module 2.412GHz ~ 2.484GHz PCB Trace Surface Mount", Package="SMD-53 Espressif Systems", Check_prices=https://www.snapeda.com/parts/ESP32-C3-MINI-1-N4/Espressif+Systems/view-part/?ref=eda, MF="Espressif Systems", MP=ESP32-C3-MINI-1-N4, SnapEDA_Link=https://www.snapeda.com/parts/ESP32-C3-MINI-1-N4/Espressif+Systems/view-part/?ref=snap
U4: "50-V, 7-ch darlington transistor array, -20C to 70C", Package="SOIC-16 Texas Instruments", Availability="In Stock", Check_prices=https://www.snapeda.com/parts/ULN2003AD/Texas+Instruments/view-part/?ref=eda, MF="Texas Instruments", MP=ULN2003AD, Price=None, Purchase-URL=https://pricing.snapeda.com/search/part/ULN2003AD/?ref=eda, SnapEDA_Link=https://www.snapeda.com/parts/ULN2003AD/Texas+Instruments/view-part/?ref=snap

## Free pads (board coordinates)
  round 4.5 hole 2.4: 1(2.246,29.798) 1(13.796,7.37) 1(16.746,50.627) 1(42.846,50.627) 1(45.796,7.37) 1(57.345,29.798)

## Via types
v1: diameter 0.6, hole 0.3, Top Layer to Bottom Layer, tented both sides, 112 vias
v2: diameter 1.27, hole 0.711, Top Layer to Bottom Layer, 9 vias
v3: diameter 0.8, hole 0.5, Top Layer to Bottom Layer, tented both sides, 3 vias

## Nets (pads, with @x,y where several pads share a name; then routed paths per layer and width w, separated by ;. In a path a pad name is that pad's centre, name@x,y a point inside that pad or via, vN(x,y) a via of type N, cw(c..) or ccw(c..) an arc to the next point about the centre after c; other vN are vias at no path point)
+3.3V: C3.2 C7.2 C8.2 C9.2 P2.1 P3.1 P5.1 R8.2 R9.2 R10.2 U1.2 U1.4 U2.3 U3.3 | length 85.7
  Top Layer w0.25: P5.1 10.163,12.863 15,17.7 16.945,17.7 17.42,18.175 v1(17.425,18.175) ; v1(22.025,18.775) 22.6,18.775 23.45,19.625 R10.2
  Top Layer w0.4: R10.2 23.55,19.625 23.75,19.825 23.75,20.575 24.05,20.875 27.55,20.875 28.85,19.575 R8.2 32.174,22.849 32.266,22.86 32.285,22.86 32.312,22.866 32.447,22.883 32.461,22.898 32.537,22.913 33.484,23.114 33.503,23.114 33.547,23.127 ccw(c33.434,23.511) 33.549,23.128 33.661,23.152 33.675,23.166 33.741,23.186 33.872,23.225 41.075,23.225 42.525,21.775 42.525,21.05 C3.2 42.537,20.963 42.537,18.413 C7.2@42.5,18.375 ; U3.3 37.85,9.95 C8.2 37.962,9.862 39.837,9.862 C9.2 39.9,9.875 40.15,10.125 40.15,10.925 41.275,12.05 ; R9.2 41.275,12.05 ; U1.2 47.6,20.215 47.335,19.95 47.145,19.95 45.57,18.375 C7.2@42.5,18.375 ; 41.275,12.05 42.985,13.76 42.985,17.89 C7.2@42.5,18.375
  Bottom Layer w0.25: v1(17.425,18.175) 17.975,18.175 18.725,18.925 21.78,18.925 21.93,18.775 v1(22.025,18.775) ; P3.1 50.251,47.212 50.251,46.106 50.164,46.019 50.164,44.691 52.027,42.828 52.027,42.764 52.555,42.237 52.618,42.237 53.845,41.01 53.845,40.946 53.959,40.833 ; v1(53.625,34.1) 53.959,34.434 53.959,40.833 ; P2.1 54.567,41.441 53.959,40.833
"+5 (Red)": C1.2 C2.2 C4.2 C10.1 P1.1 P4.1 R1.2 R4.2 U1.3 U4.9 | length 113
  Top Layer w0.4: R4.2 56.251,35.616 ; C1.2 56.621,20.625 56.696,20.7 v3(56.75,20.7) ; v3(56.275,34.85) 56.251,34.874 56.251,35.616 ; R1.2 56.924,35.708 56.343,35.708 56.251,35.616
  Top Layer w0.5: U4.9@16.686,24.053 18.268,22.471 18.268,22.132 v3(18.325,22.075) 18.268,22.018 18.268,21.535 18.032,21.3 17.95,21.3 17.712,21.062 C10.1
  Top Layer w1: C4.2 47.833,16.392 49.975,16.392 ; U1.3 49.89,19.35 ; C2.2 49.915,19.325 49.89,19.35 ; C1.2 55.025,18.2 P1.1 53.025,16.392 49.975,16.392 ; 49.89,19.35 49.89,16.477 49.975,16.392
  Bottom Layer w0.4: v3(56.275,34.85) 56.275,32.525 54.77,31.02 54.77,28.38 56.75,26.4 v3(56.75,20.7)
  Bottom Layer w1: P4.1 9.009,48.21 10.5,46.718 10.5,45.252 5.747,40.499 5.747,35.068 17.769,22.631 v3(18.325,22.075) 21.042,21.875 27.931,21.675 28.081,21.658 ; 28.081,21.657 28.539,21.657 28.847,21.644 29.174,21.606 47.811,21.606 48.104,21.313 P1.1
A1: P2.2 R1.1 | length 6.7
  Top Layer w0.25: P2.2 53.257,42.934 53.257,42.152 54.854,40.555 54.854,39.976 56.746,38.084 R1.1
A2: P3.2 R4.1 | length 15
  Top Layer w0.2: v1(51.775,44.2) 51.071,43.496 51.071,43.291 52.255,42.074 52.256,42.073 52.381,41.948 52.381,41.945 52.47,41.855 52.47,41.794 52.615,41.597 52.623,41.586 53.046,40.807 53.05,40.8 53.071,40.779 53.071,40.703 53.117,40.617 53.196,40.539 53.2,40.521 ccw(c53.395,40.566) 53.224,40.462 53.236,40.442 53.242,40.407 cw(c53.046,40.37) 53.245,40.385 53.246,40.38 ; 53.246,40.379 54.282,39.343 54.282,38.02 R4.1
  Bottom Layer w0.25: P3.2 50.626,48.281 50.626,45.95 50.539,45.864 50.539,45.068 51.066,44.541 51.339,44.541 51.68,44.2 v1(51.775,44.2)
BOOT: P5.5 R10.1 U3.23 | length 24
  Top Layer w0.25: P5.5 17.931,16.994 v1(18.014,19.218) ; R10.1 25.268,19.557 25.268,18.996 25.675,18.589 v1(25.675,18.525) 25.7,18.5 25.7,17.275 U3.23
  Bottom Layer w0.25: v1(18.014,19.218) 18.081,19.285 18.295,19.285 18.336,19.325 24.875,19.325 24.923,19.277 v1(25.675,18.525)
"Coil_1 (Orange)": P4.2 U4.16 | length 25.2
  Top Layer w0.4: U4.16 8.625,29.93 8.625,30.377 6.047,32.956 6.047,40.375 11.75,46.078 11.75,49.53 11.004,50.275 P4.2
"Coil_2 (Pink)": P4.5 U4.13 | length 27
  Top Layer w0.4: P4.5 7.301,45.964 7.301,43.857 4.472,41.027 4.472,32.303 7.05,29.725 7.05,27.54 8.29,26.3 11.841,26.3 12.508,26.967 U4.13
"Coil_3 (Yellow)": P4.3 U4.15 | length 26.5
  Top Layer w0.4: U4.15 10.427,28.424 9.729,27.725 8.625,27.725 8.1,28.25 8.1,30.16 5.522,32.738 5.522,40.592 10.764,45.835 10.764,48.524 P4.3
"Coil_4 (Blue)": P4.4 U4.14 | length 26
  Top Layer w0.4: P4.4 8.943,46.473 8.943,44.756 4.997,40.81 4.997,32.521 7.575,29.942 7.575,27.758 8.333,27 10.772,27 11.467,27.695 U4.14
E1: P2.3 R2.1 R3.2 | length 59.5
  Top Layer w0.2: R3.2@49.101,44.713 51.321,42.492 51.433,42.381 51.988,41.811 52.006,41.793 52.095,41.7 52.095,41.671 52.477,41.153 52.579,40.98 52.746,40.621 52.854,40.421 52.872,40.403 52.89,40.355 52.921,40.298 52.923,40.266 52.938,40.228 53.195,39.645 53.226,39.533 53.389,38.859 53.402,38.732 53.47,38.054 53.47,37.743 v1(53.409,34.996) ; R3.2 49.136,44.689 49.525,44.689 49.561,44.724 50.53,44.724 51.278,45.472 P2.3
  Top Layer w0.25: R2.1 19.1,20.475 v1(21.425,22.8)
  Bottom Layer w0.25: v1@21.425,22.825 24.75,22.825 28.254,22.413 28.392,22.407 28.555,22.407 29.171,22.381 29.485,22.356 30.099,22.356 37.474,22.423 41.473,25.755 41.512,25.755 41.952,26.195 41.952,26.215 42.574,26.899 44.377,28.702 44.382,28.704 44.757,28.749 45.12,28.749 45.145,28.774 45.221,28.78 cw(c45.242,28.531) 45.223,28.78 45.386,28.794 45.572,28.794 45.584,28.806 45.679,28.806 45.76,28.888 45.997,28.966 46.139,28.966 cw(c46.295,28.771) 46.234,29.013 46.346,29.125 46.556,29.257 46.651,29.257 47.091,29.696 47.091,29.702 47.257,29.872 47.397,30.012 47.397,30.015 47.474,30.091 47.474,30.194 47.6,30.408 47.677,30.484 47.677,30.537 47.753,30.613 47.753,30.667 47.866,30.858 48.082,31.083 48.102,31.104 48.386,31.285 48.772,31.419 49.414,31.607 49.542,31.607 cw(c49.682,31.4) 49.659,31.649 49.739,31.729 50.192,31.933 50.294,31.933 cw(c50.467,31.752) 50.403,31.994 50.501,32.092 50.92,32.355 50.996,32.355 51.076,32.434 51.095,32.434 51.211,32.551 51.586,32.865 51.624,32.865 52.064,33.304 52.064,33.325 52.391,33.686 52.513,33.808 52.513,33.818 52.598,33.903 52.598,33.971 52.863,34.359 52.893,34.395 53.409,34.911 v1(53.409,34.996)
E2: P3.3 R5.1 R6.2 | length 75.5
  Top Layer w0.25: R5.1 18.95,9.05 15.548,12.452 15.475,12.525 15.475,14.007 18.564,17.097 18.564,20.717 21.422,23.575 v1(21.475,23.575) ; R6.2 v1(46.232,49.359) 46.232,50.613 47.121,51.502 P3.3
  Bottom Layer w0.25: v1(21.475,23.575) 24.793,23.575 25.968,23.22 26.1,23.189 27.18,22.954 27.315,22.935 28.409,22.788 28.547,22.782 28.563,22.782 29.333,22.75 29.64,22.731 29.945,22.731 29.948,22.731 29.957,22.731 31.183,22.788 32.277,22.935 32.412,22.954 33.492,23.189 33.623,23.22 34.682,23.542 39.484,25.108 40.1,25.313 40.205,25.359 40.755,25.652 40.778,25.664 40.965,25.82 41.337,26.13 41.357,26.13 41.577,26.35 41.577,26.36 42.303,27.158 44.17,29.025 44.293,29.071 44.734,29.124 44.965,29.124 44.977,29.137 45.371,29.169 45.416,29.169 45.523,29.181 45.558,29.216 45.937,29.341 45.984,29.341 46.078,29.388 46.111,29.421 46.448,29.632 46.496,29.632 46.716,29.851 46.716,29.854 46.991,30.136 47.022,30.167 47.099,30.247 47.099,30.297 47.301,30.639 47.378,30.768 47.565,31.087 47.814,31.345 47.866,31.397 48.221,31.624 48.657,31.776 49.36,31.982 49.386,31.982 49.404,31.99 49.503,32.024 49.522,32.043 50.111,32.308 50.138,32.308 50.208,32.351 50.247,32.369 50.266,32.388 50.812,32.73 50.84,32.73 50.925,32.801 50.939,32.809 50.958,32.828 51.45,33.24 51.469,33.24 51.689,33.459 51.689,33.47 52.12,33.945 52.138,33.963 52.223,34.059 52.223,34.087 52.586,34.619 52.605,34.637 52.672,34.743 52.979,35.368 52.998,35.426 53.024,35.478 53.026,35.509 53.233,36.121 53.252,36.14 53.269,36.228 53.28,36.262 53.28,36.288 53.401,36.921 53.421,36.941 53.427,37.06 53.429,37.069 53.429,37.095 53.455,37.605 53.47,37.62 53.47,40.855 52.463,41.862 52.399,41.862 51.652,42.609 51.652,42.673 49.789,44.536 49.789,45.801 v1(46.232,49.359)
GND: C1.1 C2.1 C3.1 C4.1 C5.1 C6.1 C7.1 C8.1 C9.1 C10.2 P1.2 P2.4 P3.4 P5.4 R3.1 R6.1 R7.1 U1.1 U2.1 U3.1 U3.2 U3.11 U3.14 U3.36 U3.37 U3.38 U3.39 U3.40 U3.41 U3.42 U3.43 U3.44 U3.45 U3.46 U3.47 U3.48 U3.49_1 U3.49_2 U3.49_3 U3.49_4 U3.49_5 U3.49_6 U3.49_7 U3.49_8 U3.49_9 U3.50 U3.51 U3.52 U3.53 U4.5 U4.6 U4.7 U4.8 | length 10.1
  Top Layer w0.2: P2.4 53.148,44.83 52.052,43.735 52.052,42.769 53.954,40.867 53.954,40.171 55.25,38.875
  Top Layer w0.25: U3.50 24.875,7.4 U3.36 ; U3.48 34.575,7.4 U3.53
  other v1: 17.1,7.85 41.1,7.85 12.1,9.85 26.1,9.85 34.1,9.85 42.1,9.85 44.1,9.85 48.1,9.85 50.1,9.85 17.1,11.85 25.1,11.85 33.1,11.85 43.1,11.85 45.1,11.85 49.1,11.85 51.1,11.85 6.1,13.85 8.1,13.85 10.1,13.85 12.1,13.85 18.1,13.85 26.1,13.85 34.1,13.85 44.1,13.85 46.1,13.85 50.1,13.85 5.1,15.85 7.1,15.85 9.1,15.85 11.1,15.85 15.1,15.85 25.1,15.85 27.1,15.85 29.1,15.85 31.1,15.85 33.1,15.85 39.1,15.85 45.1,15.85 4.1,17.85 6.1,17.85 8.1,17.85 10.1,17.85 12.1,17.85 14.1,17.85 20.1,17.85 22.1,17.85 38.1,17.85 40.1,17.85 46.1,17.85 56.1,17.85 45.225,19.2 44.275,19.525 3.1,19.85 5.1,19.85 7.1,19.85 9.1,19.85 11.1,19.85 31.1,19.85 35.1,19.85 37.1,19.85 39.1,19.85 41.1,19.85 57.1,19.85 43.4,19.875 44.3,20.4 2.1,21.85 4.1,21.85 6.1,21.85 8.1,21.85 3.1,23.85 5.1,23.85 19.1,23.85 2.1,25.85 4.1,25.85 6.1,25.85 18.1,25.85 5.1,27.85 15.1,27.85 2.1,33.85 3.1,35.85 2.1,37.85 3.1,39.85 57.1,39.85 56.755,40.895 55.85,41.1 4.1,41.85 5.1,43.85 43.1,47.85 42.1,53.85 44.1,53.85 46.1,53.85 41.1,55.85
  other v2: 27.75,10.375 29.725,10.375 31.7,10.375 27.75,12.35 29.725,12.35 31.7,12.35 27.75,14.325 29.725,14.325 31.7,14.325
IN1: C5.2 R2.2 U3.26 | length 5.7
  Top Layer w0.25: C5.2@20.625,13.55 C5.2@20.8,13.725 ; R2.2 C5.2@20.8,13.725 ; U3.26 22.625,15.55 C5.2@20.8,13.725
IN2: C6.2 R5.2 U3.27 | length 7.7
  Top Layer w0.25: R5.2 20.7,11.1 C6.2 20.575,11.275 22.475,13.175 22.475,14.425 22.8,14.75 U3.27
NetR7_2: R7.2 U2.2 U3.8 | length 5.4
  Top Layer w0.25: U3.8 37.825,13.95 R7.2 38.225,14.1 U2.2
NetR8_1: R8.1 U3.22 | length 2.6
  Top Layer w0.25: U3.22 26.525,18.95 27.15,19.575 R8.1
NetR9_1: R9.1 U3.5 | length 2.4
  Top Layer w0.25: U3.5 37.225,11.55 37.725,12.05 R9.1
OUT1: U3.6 U4.1 | length 39.2
  Top Layer w0.25: U4.1 7.085,25.618 9.532,25.618 v1(9.55,25.6) ; U3.6 35.65,12.375 36.2,12.375 v1(36.925,13.1)
  Bottom Layer w0.25: v1(9.55,25.6) 13.669,25.6 18.014,21.325 20.722,21.134 21.014,21.125 27.635,20.923 27.77,20.908 28.524,20.907 28.864,20.856 33.035,20.611 33.108,20.538 36.925,16.721 v1(36.925,13.1)
OUT2: U3.18 U4.2 | length 26
  Top Layer w0.25: U4.2 8.076,24.84 v1@10.255,24.84 ; U3.18 v1(29.725,18.175)
  Bottom Layer w0.25: v1(10.255,24.815) 10.255,24.667 15.049,19.873 15.256,19.873 17.597,19.9 18.053,19.9 27.166,19.788 27.298,19.788 27.305,19.782 28.118,19.782 28.191,19.709 v1(29.725,18.175)
OUT3: U3.19 U4.3 | length 25.1
  Top Layer w0.25: U4.3 9.116,24.111 11.461,24.111 v1(11.525,24.175) ; U3.19 28.925,18.621 29.197,18.894 29.65,18.894 v1(29.717,18.961)
  Bottom Layer w0.25: v1(11.525,24.175) 13.165,22.536 17.695,20.586 17.776,20.575 20.402,20.394 20.549,20.389 27.325,20.173 27.459,20.158 ; 27.46,20.157 28.273,20.157 v1(29.717,18.961)
OUT4: U3.16 U4.4 | length 24.5
  Top Layer w0.25: U4.4 10.156,23.383 13.102,23.383 13.423,23.061 v1(13.423,23.056) ; U3.16 31.325,18.5 v1(31.35,18.525)
  Bottom Layer w0.25: v1(13.423,23.056) 17.861,20.95 20.562,20.764 20.709,20.759 27.48,20.548 27.615,20.533 ; 27.615,20.532 28.429,20.532 30,19.875 30.073,19.802 v1(31.35,18.525)
UART0_RX: P5.2 U3.30 | length 20.8
  Top Layer w0.25: v1(13.875,11.9) 14.946,11.9 18.446,8.4 21.254,8.4 21.539,8.686 21.539,11.02 22.87,12.35 U3.30
  Bottom Layer w0.25: P5.2 7.485,11.909 13.866,11.909 v1(13.875,11.9)
UART0_TX: P5.3 U3.31 | length 19.6
  Top Layer w0.25: v1(12.9,11.025) 12.925,11.05 15.266,11.05 18.291,8.025 21.409,8.025 21.914,8.53 21.914,10.864 22.575,11.525 23.8,11.525 U3.31
  Bottom Layer w0.25: P5.3 8.35,11 12.875,11 v1(12.9,11.025)
pads on no net: U3.4 U3.7 U3.9 U3.10 U3.12 U3.13 U3.15 U3.17 U3.20 U3.21 U3.24 U3.25 U3.28 U3.29 U3.32 U3.33 U3.34 U3.35 U4.10 U4.11 U4.12

## Polygon pours and split planes (outlines as drawn)
+3.3V on Top Layer "+3.3V_L01_P000" (solid, pour order 0): 32.943,23.416 42.537,20.963 47.042,20.963 47.6,20.405 47.845,20.65 51.275,20.65 51.275,20.85 54.6,24.175 54.7,24.075 60.175,24.075 62.05,25.95 62.05,36.4 59.275,36.4 57.75,34.875 48.95,34.875
GND on Top Layer "GND_L01_P002" (solid, remove dead copper, pour order 2): -10.25,65.075 46.05,65.075 69.15,41.975 69.075,41.9 69.075,14.2 60.675,14.2 53.725,7.25 2.869,7.25
GND on Bottom Layer "GND_L02_P001" (solid, remove dead copper, pour order 1): -10.25,65.075 46.05,65.075 69.15,41.975 69.075,41.9 69.075,14.2 60.675,14.2 53.845,7.37 45.796,7.37 3.02,7.37 2.875,7.225

## Silkscreen, mask and mechanical layers (free items; w line width, h text height)
Top Overlay:
  text "E" at 45.271,52.041 h1.52
  text "OR" at 11.479,50.929 h1.52
  text "K" at 45.429,49.479 h1.52
  text "YE" at 11.879,47.904 h1.52
  text "A" at 47.529,47.454 h1.52
  text "C" at 50.529,47.129 h1.52
  text "E" at 52.179,46.129 h1.52
  text "RE" at 10.154,45.754 h1.52
  text "BL" at 8.279,43.729 h1.52
  text "PI" at 4.979,43.454 h1.52
  text "K" at 51.029,42.479 h1.52
  text "AutomaticTrickleVent" at 5.1,42.275 h1 r270
  text "Rev.1" at 3.45,42.15 h1 r270
  text "A" at 52.629,40.629 h1.52
  text "C" at 55.108,40.23 h1.52
  text "+" at 54.829,16.25 h1.52
  text "3V3" at 7.619,13.603 h1 r42
  text "RX" at 8.594,12.578 h1 r42
  text "TX" at 9.519,11.453 h1 r42
  text "-" at 51.854,11.442 h1.52
  text "GND" at 10.469,10.478 h1 r42
  text "boot" at 11.519,9.478 h1 r42
Bottom Overlay:
  text "E" at 46.188,51.966 h1.52
  text "OR" at 14.046,50.979 h1.52
  text "K" at 46.346,49.404 h1.52
  text "YE" at 14.446,47.954 h1.52
  text "A" at 48.446,47.379 h1.52
  text "C" at 51.446,47.054 h1.52
  text "E" at 53.076,46.221 h1.52
  text "RE" at 12.721,45.804 h1.52
  text "BL" at 10.846,43.779 h1.52
  text "PI" at 7.546,43.504 h1.52
  text "K" at 51.946,42.404 h1.52
  text "A" at 53.546,40.554 h1.52
  text "C" at 56.025,40.155 h1.52
  text "Automatic Trickle Vent" at 54.275,18.9 h2.8
  text "+" at 55.821,16.3 h1.52
  text "3V3" at 9.725,15.662 h1 r42
  text "RX" at 10.082,13.918 h1 r42
  text "TX" at 11.007,12.843 h1 r42
  text "GND" at 12.65,12.137 h1 r42
  text "boot" at 14.022,11.744 h1 r42
  text "-" at 52.846,11.492 h1.52
Mechanical 14:
  drawing of 667 lines, arcs and shapes, not listed